# Altium PCB coaster.PcbDoc (part 1 of 2)
Units mm, origin at the board's own origin, x right, y up, seen from the top; angles counter-clockwise.
Board outline 33.53 x 29.59 mm, 2 copper layers (Top Layer, Bottom Layer); 49 components, 51 nets, 176 pads, 66 vias.
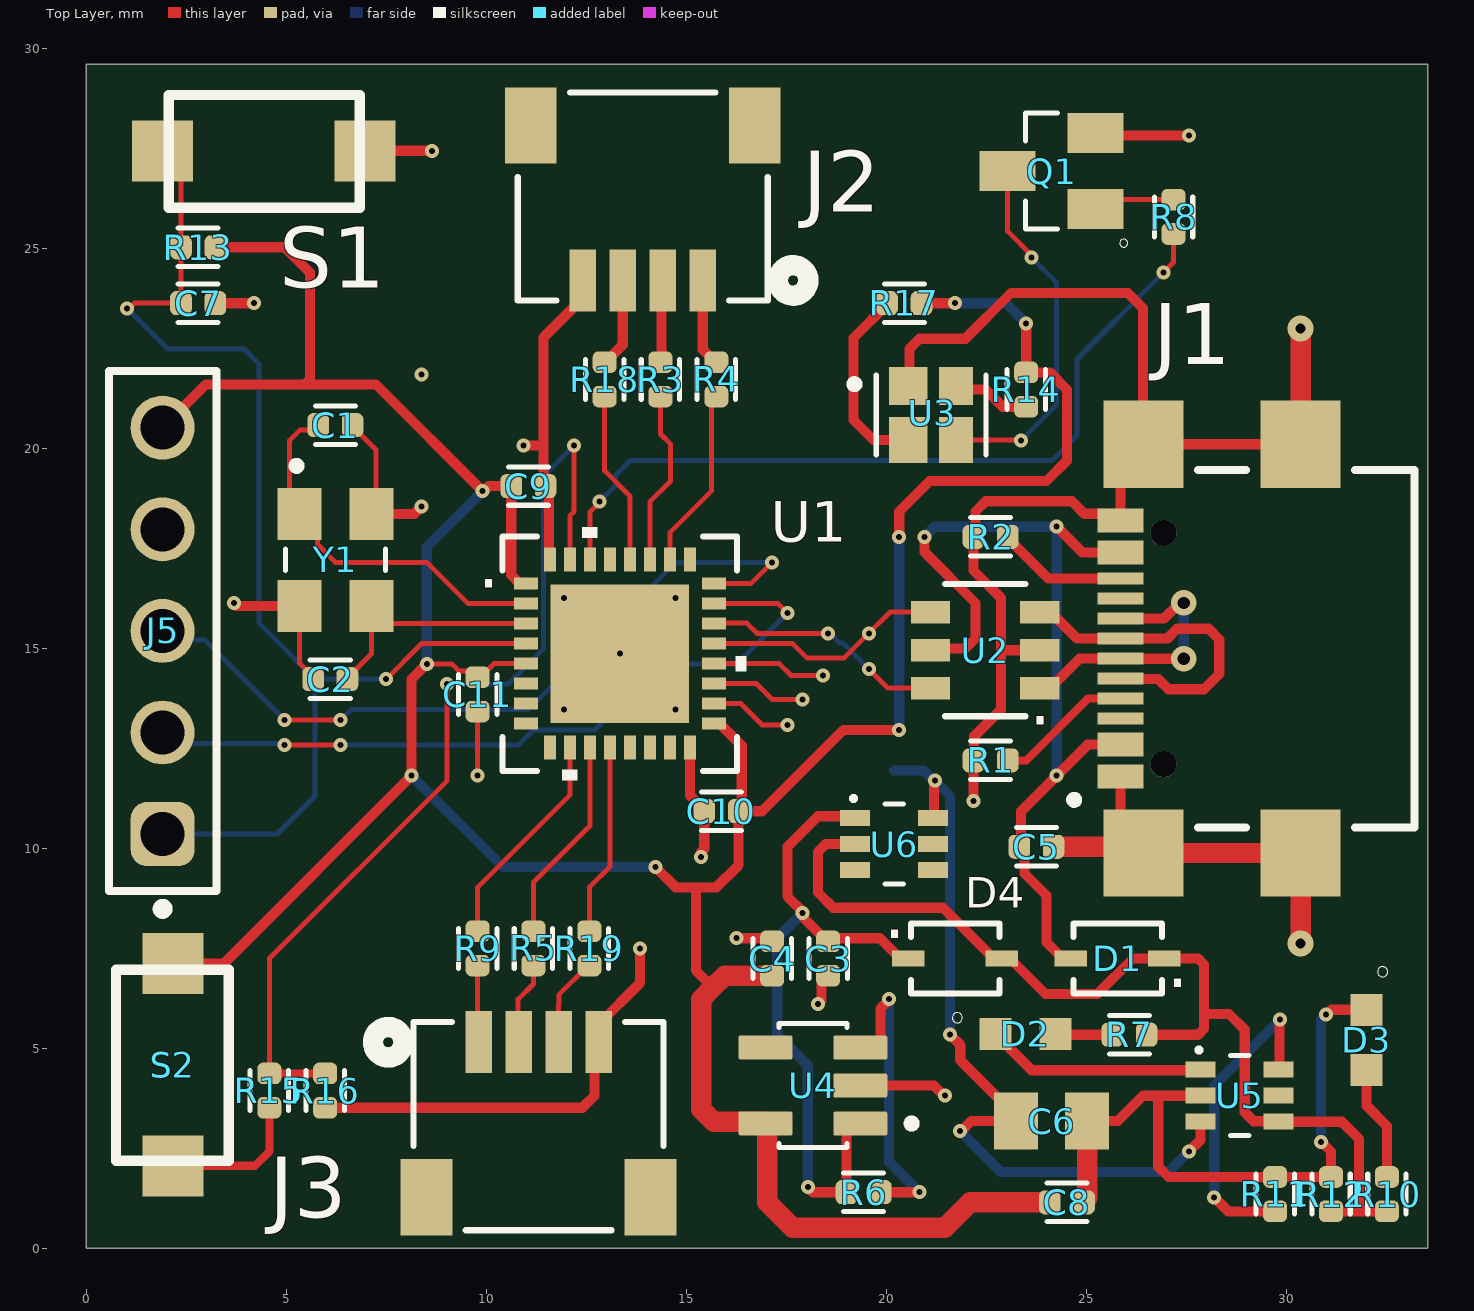
[diagram p0: Top Layer view]
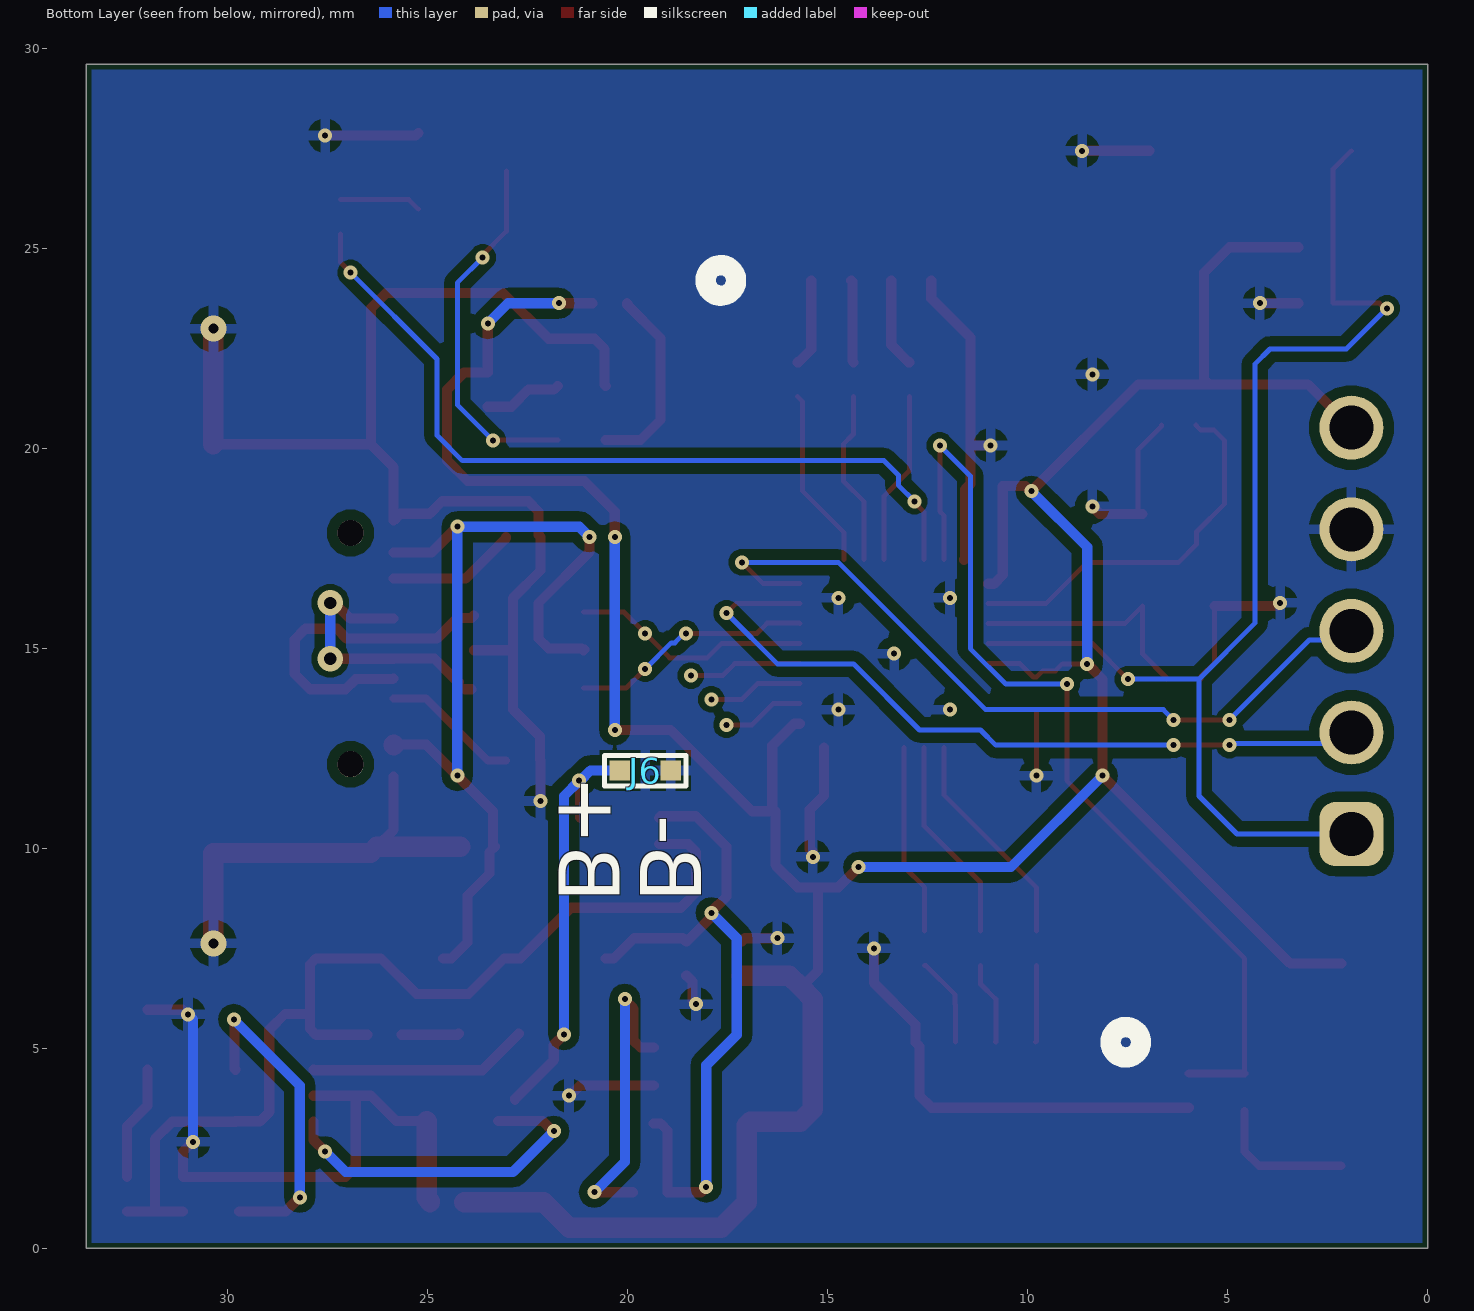
[diagram p1: Bottom Layer view, seen from below]
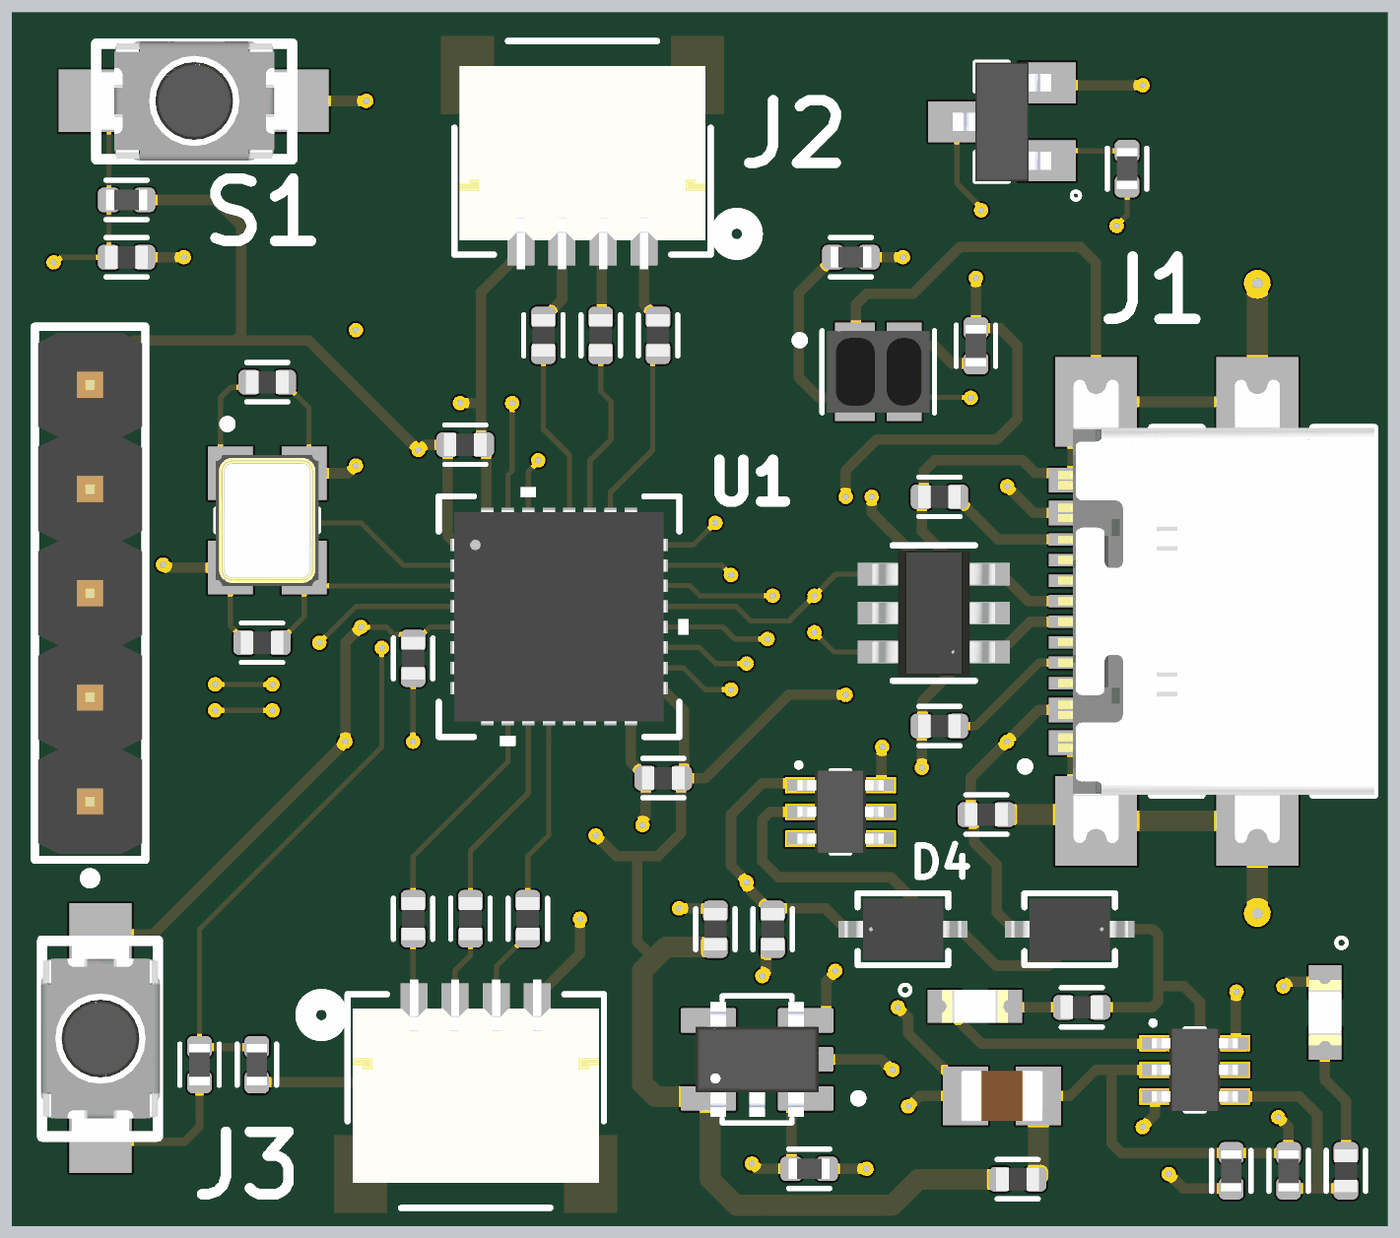
[diagram p2: 3D render of the assembled board from above, using the file's embedded part models]

## Layer stack, top to bottom
Top Solder: solder mask 0.0102, Solder Resist, Dk 3.5
Top Layer: signal copper 0.0356
Dielectric 1: dielectric 0.32, FR-4, Dk 4.8
Bottom Layer: signal copper 0.0356
Bottom Solder: solder mask 0.0102, Solder Resist, Dk 3.5

## Board outline
0,0 0,29.591 33.528,29.591 33.528,0

## Design rules (kind name [scope] priority, off if disabled: settings)
Clearance [All] p1: gap=0.254 ignorepadtopadclearanceinfootprint=TRUE except(0: Arc-Hole Track-Hole SMDPad-Hole THPad-Hole Via-Hole Fill-Hole Poly-Hole Region-Hole Text-Hole; 0.127: Arc-Arc Arc-Track Track-Track THPad-Via; 0.15: Via-Fill Via-Poly Via-Region; 0.152: Arc-SMDPad Track-SMDPad SMDPad-SMDPad; 0.203: Arc-Via Track-Via SMDPad-Via Via-Via)
PolygonConnect [All] p1: connectstyle=Relief reliefconductorwidth=0.254 reliefentries=4 polygonreliefangle="90 Angle" airgapwidth=0.254
RoomDefinition coaster [InComponentClass('coaster')] p1: confinementstyle=ConfineOut formatcopy=TRUE lockcomponents=FALSE outline 30.988,27.432 32.639,27.432 32.639,28.829 30.988,28.829
RoutingVias [All] p1: holewidth=0.15 width=0.35 viastyle="Through Hole" minholewidth=0.15 minwidth=0.35 maxholewidth=0.711 maxwidth=1.27
SolderMaskExpansion [All] p1: expansion=0.052 istentingtop=FALSE
Width [All] p1: maxlimit=0.508 minlimit=0.125 preferedwidth=0.254
30 further rules are at their usual default settings.

## Components (designator, comment, footprint, x,y, rotation, side; value= is the part's Value field where it differs from the comment)
C1 "C10" RC0402 6.223,20.574 r0 top
C2 "C10" RC0402 6.096,14.224 r180 top
C3 "CC0402KRX5R5BB105" RC0402 18.542,7.239 r270 top
C4 "CC0402KRX5R5BB105" RC0402 17.145,7.239 r90 top
C5 "104" CAPC1005X55N2 23.749,10.033 r0 top
C6 "CL21A106KOQNNNG" CAPC2012X140N 24.13,3.175 r180 top
C7 "104" CAPC1005X55N2 2.794,23.622 r0 top
C8 "104" CAPC1005X55N2 24.511,1.143 r0 top
C9 "104" CAPC1005X55N2 11.049,19.05 r0 top
C10 "104" CAPC1005X55N2 15.875,10.922 r180 top
C11 "104" CAPC1005X55N2 9.779,13.843 r90 top
D1 "SD103AWS-E3-08" CR_WS-E3-08_VIS-L 25.781,7.239 r180 top
D2 "LED" LEDM1608X80 23.47,5.357 r0 top
D3 "LED" LEDM1608X80 32.004,5.207 r270 top
D4 "SD103AWS-E3-08" CR_WS-E3-08_VIS-L 21.717,7.239 r0 top
J1 "USB-C" GCT_USB4110GFA 26.924,14.986 r90 top
J2 "SM04B-SRSS-TB" CONN_SM04B-SRSS-TB_JST 13.908,26.289 r0 top
J3 "SM04B-SRSS-TB" CONN_SM04B-SRSS-TB_JST 11.303,3.048 r180 top
J5 "61300511121" HEADER_M_5 1.905,15.43 r90 top
J6 "SMD_BATT_SOLDER" SMD_BATT_SOLDER 19.558,11.938 r90 bottom
Q1 "MMBT3904LT1G" SOT95P240X111-3N 24.131,26.924 r180 top
R1 "5K1" RC0402 22.606,12.192 r180 top
R2 "5K1" RC0402 22.606,17.78 r0 top
R3 "5K1" RC0402 14.351,21.717 r90 top
R4 "5K1" RC0402 15.748,21.717 r90 top
R5 "5K1" RC0402 11.176,7.493 r270 top
R6 "15K0402" RC0402X 19.431,1.397 r180 top
R7 "ERA-2AEB332X" RC0402 26.075,5.334 r180 top
R8 "15K0402" RC0402X 27.178,25.781 r270 top
R9 "5K1" RC0402 9.779,7.493 r270 top
R10 "ERA-2AEB332X" RC0402 32.512,1.348 r90 top
R11 "RC0402JR-0710KL" RC0402X 29.718,1.348 r90 top
R12 "RC0402JR-07100KL" RC0402X 31.115,1.348 r90 top
R13 "RC0402JR-0710KL" RC0402X 2.794,25.019 r0 top
R14 "CRGCQ1206F2K2" RC0402X 23.495,21.463 r90 top
R15 "RC0402JR-071KL" RC0402X 4.572,3.937 r90 top
R16 "RC0402JR-07100KL" RC0402X 5.969,3.937 r90 top
R17 "RC0402JR-0710KL" RC0402X 20.447,23.622 r180 top
R18 "5K1" RC0402 12.954,21.717 r90 top
R19 "5K1" RC0402 12.573,7.493 r270 top
S1 "SW_P" SW 4.445,27.432 r180 top
S2 "SW_P" SW 2.159,4.572 r90 top
U1 "STM32L432KBU6" UFQFPN-32 13.335,14.859 r0 top
U2 "USBLC6" SOT23-6L_STM 22.468,14.946 r180 top
U3 "VCNT2020" XDCR_VCNT2020 21.115,20.828 r0 top
U4 "AP2112K-3.3TRG1" SOT95P285X140-5N 18.161,4.064 r180 top
U5 "TP4057" SOP65P210X110-6N 28.829,3.81 r0 top
U6 "CJ3139KDW-G" SOP65P210X110-6N 20.193,10.098 r0 top
Y1 "ECS-80-12-33-JGN-TR" XTAL_ECS-240-8-33-AGN-TR 6.223,17.205 r270 top

## Footprints (in the part's own frame and the unit in brackets; to place one, negate y for a bottom-side part, rotate by r counter-clockwise, add the part's x,y. Pads: shape width x height; smd on the part's side, far side on the other; paste and mask are expansions set on the pad)
CAPC1005X55N2 [mm]
  rrect53% 0.54x0.6 smd: 1(-0.43,0) 2(0.43,0)
  silkscreen extent -0.5,-0.48 0.5,0.48, body extent -0.52,-0.28 0.52,0.28, height 0.56
CAPC2012X140N [mm]
  rect 1.1x1.43 smd: 1(-0.888,0) 2(0.888,0)
  body extent -1,-0.63 1,0.63, height 1.4
CONN_SM04B-SRSS-TB_JST [mil]
  rect 26x61 smd paste+0 mask+0: 1(59.06,-82.62) 2(19.68,-82.62) 3(-19.68,-82.62) 4(-59.06,-82.62)
  rect 51x75 smd paste-37.5 mask-37.5: 5(-110.24,69.94) 6(110.24,69.94)
  silkscreen extent -123,-102 163,102, body extent -118,-117 118,78, height 128
CR_WS-E3-08_VIS-L [mil]
  rect 32x16 smd paste+0 mask+0: 1(-46,0) 2(46,0)
  silkscreen extent -44,-35 44,35, body extent -56,-29 56,29, height 45
GCT_USB4110GFA [mm]
  rect 0.6x1.15 smd: A1/B12(-3.2,1.075) A4/B9(-2.4,1.075) B1/A12(3.2,1.075) B4/A9(2.4,1.075)
  rect 0.3x1.15 smd: A5(-1.25,1.075) A6(-0.25,1.075) A7(0.25,1.075) A8(1.25,1.075) B5(1.75,1.075) B6(0.75,1.075) B7(-0.75,1.075) B8(-1.75,1.075)
  rect 2.18x2 smd: S1(-5.11,0.5) S2(5.11,0.5) S3(-5.11,-3.43) S4(5.11,-3.43)
  round 0.65 hole 0.65 unplated: ""(-2.89,0) ""(2.89,0)
  silkscreen extent -4.47,-6.28 4.47,2.33, body extent -5.65,-6.28 5.65,1.42, height 3.26
HEADER_M_5 [mm] "Pin Header, pitch 2.54 mm, THT, Vertical, single row, 5p"
  rrect50% 1.6x1.6 hole 1.1: 1(-5.08,0)
  round 1.6 hole 1.1: 2(-2.54,0) 3(0,0) 4(2.54,0) 5(5.08,0)
  silkscreen extent -7.07,-1.35 6.5,1.35, body extent -6.35,-1.27 6.35,1.27, height 8.57
LEDM1608X80 [mm]
  rect 0.8x0.8 smd: A(0.75,0) C(-0.75,0)
  silkscreen extent -1.83,0.27 -1.57,0.53, body extent -0.8,-0.4 0.8,0.4, height 0.8
RC0402 [mm]
  rrect53% 0.54x0.6 smd: 1(-0.43,0) 2(0.43,0)
  silkscreen extent -0.5,-0.48 0.5,0.48, body extent -0.52,-0.28 0.52,0.28, height 0.56
RC0402X [mm]
  rrect53% 0.54x0.6 smd: 1(-0.43,0) 2(0.43,0)
  silkscreen extent -0.5,-0.48 0.5,0.48, body extent -0.5,-0.25 0.5,0.25, height 0.4
SMD_BATT_SOLDER [mil]
  rect 20x20 smd: 1(0,25) 2(0,-25)
  silkscreen extent -15,-40 15,40
SOP65P210X110-6N [mm]
  rect 0.75x0.4 smd paste-0.05 mask+0.05: 1(-0.975,0.65) 2(-0.975,0) 3(-0.975,-0.65) 4(0.975,-0.65) 5(0.975,0) 6(0.975,0.65)
  silkscreen extent -1.07,-1 0.23,1.19, body extent -1.05,-1 1.05,1, height 1.1
SOT23-6L_STM [mil]
  rect 38.5x22 smd paste+0 mask+0: 1(-53.75,37.4) 2(-53.75,0) 3(-53.75,-37.4) 4(53.75,-37.4) 5(53.75,0) 6(53.75,37.4)
  silkscreen extent -40,-65 40,65, body extent -59,-60 59,60, height 57
SOT95P240X111-3N [mm]
  rect 1.4x1 smd: 1(-1.1,0.95) 2(-1.1,-0.95) 3(1.1,0)
  silkscreen extent -1.9,-1.45 0.65,1.9, body extent -1.2,-1.45 1.2,1.45, height 1.11
SOT95P285X140-5N [mm]
  rrect15% 1.35x0.6 smd: 1(-1.185,0.95) 2(-1.185,0) 3(-1.185,-0.95) 4(1.185,-0.95) 5(1.185,0.95)
  silkscreen extent -2.57,-1.55 0.85,1.55, body extent -1.5,-1.4 1.5,1.4, height 1.4
SW [mil]
  rect 60x60 smd: 1(-99,0) 2(100,0)
  silkscreen extent -94,-55 94,56, body extent -94,-57 94,57, height 87
UFQFPN-32 [mm]
  rect 0.6x0.3 smd paste+0 mask+0: 1(-2.35,1.75) 2(-2.35,1.25) 3(-2.35,0.75) 4(-2.35,0.25) 5(-2.35,-0.25) 6(-2.35,-0.75) 7(-2.35,-1.25) 8(-2.35,-1.75) 17(2.35,-1.75) 18(2.35,-1.25) 19(2.35,-0.75) 20(2.35,-0.25) 21(2.35,0.25) 22(2.35,0.75) 23(2.35,1.25) 24(2.35,1.75)
  rect 0.3x0.6 smd paste+0 mask+0: 9(-1.75,-2.35) 10(-1.25,-2.35) 11(-0.75,-2.35) 12(-0.25,-2.35) 13(0.25,-2.35) 14(0.75,-2.35) 15(1.25,-2.35) 16(1.75,-2.35) 25(1.75,2.35) 26(1.25,2.35) 27(0.75,2.35) 28(0.25,2.35) 29(-0.25,2.35) 30(-0.75,2.35) 31(-1.25,2.35) 32(-1.75,2.35)
  rect 3.454x3.454 smd paste-1.727 mask+0: 33(0,0)
  silkscreen extent -2.93,-3.16 3.16,3.16, body extent -2.6,-2.6 2.6,2.6, height 1.4
XDCR_VCNT2020 [mm]
  rect 0.97x0.95 smd: 1(-0.57,0.725)
  rect 0.97x1.15 smd: 2(-0.57,-0.625)
  rect 0.85x0.95 smd: 3(0.63,0.725)
  rect 0.85x1.15 smd: 4(0.63,-0.625)
  silkscreen extent -2.01,-1 1.37,1, body extent -1.25,-1 1.25,1, height 0.8
XTAL_ECS-240-8-33-AGN-TR [mm]
  rect 1.3x1.1 smd: 1(-1.15,-0.9) 2(1.15,-0.9) 3(1.15,0.9) 4(-1.15,0.9)
  silkscreen extent -2.45,-1.25 0.27,1.25, body extent -1.6,-1.25 1.6,1.25, height 0.8

## Part data
C1 C2: "0402 10 pF 50 V ±5 % Tolerance NP0 SMT Multilayer Ceramic Capacitor", Capacitance=10pF, Case Code (Imperial)=0402, Case Code (Metric)=1005, Dielectric=C0G, Dielectric Material=4241ConductorMaterial, Insulation Resistance=100GR, Manufacturer=Yageo, Manufacturer Part Number=CC0402JRNPO9BN100, Max Operating Temperature=125°C, Min Operating Temperature=-55°C, Package Quantity=1, Supplier Part Number 1=311-1014-1-ND, Temperature Coefficient=30ppm/°C, Tolerance=5%, Voltage=50V, Case/Package=0402, Category="Ceramic Capacitors", ComponentLink1Description=https://datasheet.ciiva.com/11786/0900766b8079c870-11786158.pdf?src-supplier=Rs, ComponentLink1URL=https://datasheet.ciiva.com/11786/0900766b8079c870-11786158.pdf?src-supplier=Rs, ComponentLink2Description=https://datasheet.ciiva.com/143/mlccorderingcode-143992.pdf?src-supplier=Digikey, ComponentLink2URL=https://datasheet.ciiva.com/143/mlccorderingcode-143992.pdf?src-supplier=Digikey, ComponentLink3Description=https://datasheet.ciiva.com/143/mlccorderingcode-143993.pdf?src-supplier=Digikey, ComponentLink3URL=https://datasheet.ciiva.com/143/mlccorderingcode-143993.pdf?src-supplier=Digikey, ComponentLink4Description=https://datasheet.ciiva.com/143/mlccorderingcode-143994.pdf?src-supplier=Digikey, ComponentLink4URL=https://datasheet.ciiva.com/143/mlccorderingcode-143994.pdf?src-supplier=Digikey, ComponentLink5Description=https://datasheet.ciiva.com/8033/1443161-8033591.pdf?src-supplier=Element14, ComponentLink5URL=https://datasheet.ciiva.com/8033/1443161-8033591.pdf?src-supplier=Element14, ComponentLink6Description=https://datasheet.ciiva.com/8033/1443161-8033593.pdf?src-supplier=Element14, ComponentLink6URL=https://datasheet.ciiva.com/8033/1443161-8033593.pdf?src-supplier=Element14, ComponentLink7Description=https://datasheet.ciiva.com/8033/1443161-8033596.pdf?src-supplier=Element14, ComponentLink7URL=https://datasheet.ciiva.com/8033/1443161-8033596.pdf?src-supplier=Element14, ComponentLink8Description=https://datasheet.ciiva.com/28450/1443161-28450213.pdf?src-supplier=Element14, ComponentLink8URL=https://datasheet.ciiva.com/28450/1443161-28450213.pdf?src-supplier=Element14, ComponentLink9Description=https://datasheet.ciiva.com/5427/upy-gp-np0-16v-to-50v-8-5427741.pdf?src-supplier=Mouser, ComponentLink9URL=https://datasheet.ciiva.com/5427/upy-gp-np0-16v-to-50v-8-5427741.pdf?src-supplier=Mouser, Depth=0.5mm, Halogen Free=5694HalogenFree, Height=0.5mm, Lead Free="Lead Free", Length=1mm, Mount="Surface Mount", Number of Pins=2, Packaging="Tape and Reel", Pricing 1="1=0.1, 10=0.024, 100=0.0133, 1000=0.00812, 2500=0.00685, 5000=0.00609 (USD)", Radiation Hardening=No, Reach SVHC Compliant=No, RoHS=Yes, RoHS Compliant=Yes, Series=CC, Stock 1=1109319, Supplier 1=Digikey, Termination=SMD/SMT, Thickness=0.022inch, Voltage Rating=50V, Voltage Rating (AC)=50V, Voltage Rating (DC)=50V, Width=0.02inch
C3 C4: library part C105, "Multilayer Ceramic Capacitor, 1 uF, 100 V, ï¿½ 10%, X7R, 0402 [1005 Metric]", Capacitance=1uF, Case Code (Imperial)=0402, Case Code (Metric)=1005, Dielectric=X5R, Dielectric Material=Ceramic, Manufacturer=Yageo, Max Operating Temperature=85°C, Min Operating Temperature=-55°C, Supplier Part Number 1=311-1438-1-ND, Temperature Coefficient=30ppm/°C, Tolerance=10%, Voltage Rating=6.3V, Case/Package=0402, Category="Ceramic Capacitors", ComponentLink1Description=https://datasheet.ciiva.com/5789/70765-5789520.pdf?src-supplier=Farnell, ComponentLink1URL=https://datasheet.ciiva.com/5789/70765-5789520.pdf?src-supplier=Farnell, ComponentLink2Description=https://datasheet.ciiva.com/176/mlccorderingcode-176609.pdf?src-supplier=Digikey, ComponentLink2URL=https://datasheet.ciiva.com/176/mlccorderingcode-176609.pdf?src-supplier=Digikey, ComponentLink3Description=https://datasheet.ciiva.com/176/mlccorderingcode-176610.pdf?src-supplier=Digikey, ComponentLink3URL=https://datasheet.ciiva.com/176/mlccorderingcode-176610.pdf?src-supplier=Digikey, ComponentLink4Description=https://datasheet.ciiva.com/176/mlccorderingcode-176611.pdf?src-supplier=Digikey, ComponentLink4URL=https://datasheet.ciiva.com/176/mlccorderingcode-176611.pdf?src-supplier=Digikey, ComponentLink5Description=https://datasheet.ciiva.com/11464/upy-gphc-x5r-4v-to-50v-12-11464863.pdf?src-supplier=Avnet, ComponentLink5URL=https://datasheet.ciiva.com/11464/upy-gphc-x5r-4v-to-50v-12-11464863.pdf?src-supplier=Avnet, ComponentLink6Description=https://datasheet.ciiva.com/8033/1525783-8033643.pdf?src-supplier=Element14, ComponentLink6URL=https://datasheet.ciiva.com/8033/1525783-8033643.pdf?src-supplier=Element14, ComponentLink7Description=https://datasheet.ciiva.com/8033/1525783-8033644.pdf?src-supplier=Element14, ComponentLink7URL=https://datasheet.ciiva.com/8033/1525783-8033644.pdf?src-supplier=Element14, ComponentLink8Description=https://datasheet.ciiva.com/8033/70765-8033646.pdf?src-supplier=Element14, ComponentLink8URL=https://datasheet.ciiva.com/8033/70765-8033646.pdf?src-supplier=Element14, ComponentLink9Description=https://datasheet.ciiva.com/28450/1359354-28450285.pdf?src-supplier=Element14, ComponentLink9URL=https://datasheet.ciiva.com/28450/1359354-28450285.pdf?src-supplier=Element14, Depth=0.5mm, Halogen Free=5694HalogenFree, Height=0.5mm, Lead Free="Lead Free", Length=1mm, Manufacturer Part Number=CC0402KRX5R5BB105, Material=Ceramic, Mount="Surface Mount", Number of Pins=2, Packaging="Tape and Reel", Pricing 1="1=0.1, 10=0.054, 100=0.0318, 1000=0.02066, 2500=0.01646, 5000=0.01625 (USD)", Radiation Hardening=No, Reach SVHC Compliant=No, RoHS=Yes, RoHS Compliant=Yes, Series=CC, Stock 1=21136934, Supplier 1=Digikey, Termination=SMD/SMT, Voltage Rating (AC)=6.3V, Voltage Rating (DC)=6.3V, Width=0.5mm
C5 C7 C8 C9 C10 C11: library part CC0402KRX7R7BB104, "Multilayer Ceramic Capacitor, 0.1 uF, 16 V, ï¿½ 10%, X7R, 0402 [1005 Metric]", Capacitance=100nF, Case Code (Imperial)=0402, Case Code (Metric)=1005, Dielectric=X7R, LCSC=C60474, Manufacturer=Yageo, Max Operating Temperature=125°C, Min Operating Temperature=-55°C, Package Quantity=1, Supplier Part Number 1=311-1338-1-ND, Temperature Coefficient=30ppm/°C, Tolerance=10%, Voltage=16V, Case/Package=0402, Category="Ceramic Capacitors", ComponentLink1Description=https://datasheet.ciiva.com/11788/0900766b80ce67ed-11788364.pdf?src-supplier=Rs, ComponentLink1URL=https://datasheet.ciiva.com/11788/0900766b80ce67ed-11788364.pdf?src-supplier=Rs, ComponentLink2Description=https://datasheet.ciiva.com/7978/1489800-7978111.pdf?src-supplier=Element14, ComponentLink2URL=https://datasheet.ciiva.com/7978/1489800-7978111.pdf?src-supplier=Element14, ComponentLink3Description=https://datasheet.ciiva.com/161/mlccorderingcode-161545.pdf?src-supplier=Digikey, ComponentLink3URL=https://datasheet.ciiva.com/161/mlccorderingcode-161545.pdf?src-supplier=Digikey, ComponentLink4Description=https://datasheet.ciiva.com/161/mlccorderingcode-161544.pdf?src-supplier=Digikey, ComponentLink4URL=https://datasheet.ciiva.com/161/mlccorderingcode-161544.pdf?src-supplier=Digikey, ComponentLink5Description=https://datasheet.ciiva.com/161/mlccorderingcode-161546.pdf?src-supplier=Digikey, ComponentLink5URL=https://datasheet.ciiva.com/161/mlccorderingcode-161546.pdf?src-supplier=Digikey, ComponentLink6Description=https://datasheet.ciiva.com/8033/1734573-8033661.pdf?src-supplier=Element14, ComponentLink6URL=https://datasheet.ciiva.com/8033/1734573-8033661.pdf?src-supplier=Element14, ComponentLink7Description=https://datasheet.ciiva.com/11587/upy-gphc-x7r-6-3v-to-50v-8-11587305.pdf?src-supplier=Avnet, ComponentLink7URL=https://datasheet.ciiva.com/11587/upy-gphc-x7r-6-3v-to-50v-8-11587305.pdf?src-supplier=Avnet, Depth=0.5mm, Halogen Free=5694HalogenFree, Height=0.5mm, Lead Free=5697LeadFree, Length=1mm, Manufacturer Part Number=CC0402KRX7R7BB104, Material=4241ConductorMaterial, Mount="Surface Mount", Number of Pins=2, Packaging="Tape and Reel", Pricing 1="1=0.1, 10=0.024, 50=0.0164, 100=0.0139, 500=0.0098, 1000=0.00852, 2500=0.00718, 5000=0.00636 (USD)", Radiation Hardening=No, Reach SVHC Compliant=No, RoHS=Yes, RoHS Compliant=Yes, Series=CC, Stock 1=15609894, Supplier 1=Digikey, Termination=SMD/SMT, Thickness=0.022inch, Voltage Rating=16V, Voltage Rating (AC)=16V, Voltage Rating (DC)=16V, Width=0.02inch
C6: library part 10uF16v0805, "10 ÂµF Â±10% 16V Ceramic Capacitor X5R 0805 (2012 Metric)", Package="2012-2 SAMSUNG", Check_prices=https://www.snapeda.com/parts/CL21A106KOQNNNG/Samsung/view-part/?ref=eda, MF="Samsung Electro-Mechanics", MP=CL21A106KOQNNNG, SnapEDA_Link=https://www.snapeda.com/parts/CL21A106KOQNNNG/Samsung/view-part/?ref=snap
D1 D4: "SCHOTTKY DIODE SOD323", Manufacturer_Name=Vishay, Copyright="Copyright (C) 2025 Ultra Librarian. All rights reserved.", Datasheet=https://www.vishay.com/doc?85682, Manufacturer_Part_Number=SD103AWS-E3-08
D2 D3: library part LTST-C190KFKT, "Single Color LED, Ultra Bright Orange, Water Clear, 1.1mm", Case Code (Imperial)=0603, Case Code (Metric)=1608, Color=Orange, Forward Current=30mA, Forward Voltage=2V, Lens Color=Colorless, Manufacturer="Vishay Lite-On", Max Operating Temperature=85°C, Min Operating Temperature=-55°C, Package Quantity=3000, Power Dissipation=75mW, Resistance=47kR, Reverse Voltage=5V, Supplier Part Number 1=160-1434-1-ND, Test Current=20mA, Tolerance=1%, Voltage Rating=50V, Case/Package=0603, Category=LEDs, ComponentLink1Description=https://datasheet.ciiva.com/11774/0900766b80dc02a7-11774744.pdf?src-supplier=Rs, ComponentLink1URL=https://datasheet.ciiva.com/11774/0900766b80dc02a7-11774744.pdf?src-supplier=Rs, ComponentLink2Description=https://datasheet.ciiva.com/15201/getdatasheetpartid-309341-15201388.pdf?src-supplier=Verical, ComponentLink2URL=https://datasheet.ciiva.com/15201/getdatasheetpartid-309341-15201388.pdf?src-supplier=Verical, ComponentLink3Description=https://datasheet.ciiva.com/16396/lite-on20ltst-c190kfkt-16396246.pdf?src-supplier=Future+Electronics, ComponentLink3URL=https://datasheet.ciiva.com/16396/lite-on20ltst-c190kfkt-16396246.pdf?src-supplier=Future+Electronics, ComponentLink4Description=https://datasheet.ciiva.com/12400/100-ltst-c190kfkt-53640-12400769.pdf?src-supplier=Mouser, ComponentLink4URL=https://datasheet.ciiva.com/12400/100-ltst-c190kfkt-53640-12400769.pdf?src-supplier=Mouser, ComponentLink5Description=https://datasheet.ciiva.com/2109/s-110-ltst-c190kfkt-2109976.pdf?src-supplier=Digikey, ComponentLink5URL=https://datasheet.ciiva.com/2109/s-110-ltst-c190kfkt-2109976.pdf?src-supplier=Digikey, ComponentLink6Description=https://datasheet.ciiva.com/2109/s-110-ltst-c190kfkt-2109977.pdf?src-supplier=Digikey, ComponentLink6URL=https://datasheet.ciiva.com/2109/s-110-ltst-c190kfkt-2109977.pdf?src-supplier=Digikey, ComponentLink7Description=https://datasheet.ciiva.com/2109/s-110-ltst-c190kfkt-2109978.pdf?src-supplier=Digikey, ComponentLink7URL=https://datasheet.ciiva.com/2109/s-110-ltst-c190kfkt-2109978.pdf?src-supplier=Digikey, Depth=1.6mm, Dominant Wavelength=605nm, Height=0.9mm, Illumination Color=Orange, Lead Free="Lead Free", Length=3.2mm, Lens Size=0.8mm, Lens Style=Flat,Diffused,Colorless,Rectangular,Clear, Lens Transparency=Clear, Luminous Intensity=90mcd, Manufacturer Part Number=LTST-C190KFKT, Mount="Surface Mount", Number of Elements=1, Number of LEDs=1, Number of Pins=2, Packaging="Tape and Reel", Power Rating=75mW, Pricing 1="1=0.13, 10=0.089, 100=0.0613, 500=0.0484, 1000=0.0441, 2000=0.04042 (USD)", Radiation Hardening=No, Reach SVHC Compliant=4186SVHC, RoHS=Yes, RoHS Compliant=Yes, Series=-, Stock 1=96032, Supplier 1=Digikey, Viewing Angle=130°, Voltage Rating (DC)=50V, Wavelength=605nm, Width=0.8mm
J1: library part USB4110-GF-A, "C42400246", Manufacturer=HOAUC, Supplier Part Number 1=2073-USB4110-GF-A-1-ND, Voltage Rating=20V, Category="USB Connectors", ComponentLink1Description=https://gct.co/files/drawings/usb4110.pdf?src-supplier=Digikey, ComponentLink1URL=https://gct.co/files/drawings/usb4110.pdf?src-supplier=Digikey, Contact Material=153,157ConductorMaterial, Height=3.46mm, Manufacturer Part Number=C42400246, Number of Contacts=16NUMBER, Number of Pins=16NUMBER, Orientation=5496OrientationType, Pricing 1="1=1.64, 10=1.244, 25=1.1176, 50=1.032, 100=0.9547, 250=0.86368, 500=0.80254 (USD)", RoHS=No, Stock 1=30215, Supplier 1=Digikey, USB Standard=6108USBStandard
J2 J3: "No Description Available", Manufacturer_Name=JST, Copyright="Copyright (C) 2025 Ultra Librarian. All rights reserved.", Manufacturer_Part_Number=SM04B-SRSS-TB, RefDes=RefDes, Type=Type
J5: library part HEADER_M_5, "THT Vertical Pin Header WR-PHD, Pitch 2.54 mm, Single Row, 5 pins", Color=Black, Contact Resistance=20mR, Current Rating=3A, Manufacturer="Wurth Electronics", Max Operating Temperature=105°C, Min Operating Temperature=-40°C, Operating Supply Voltage=250V, Supplier Part Number 1=732-5318-ND, Category="Headers and Wire Housings", ComponentLink1Description=https://katalog.we-online.de/em/datasheet/6130xx11121.pdf?src-supplier=Digikey, ComponentLink1URL=https://katalog.we-online.de/em/datasheet/6130xx11121.pdf?src-supplier=Digikey, ComponentLink2Description=http://www.farnell.com/cad/1737268.pdf?src-supplier=Element14, ComponentLink2URL=http://www.farnell.com/cad/1737268.pdf?src-supplier=Element14, ComponentLink3Description=https://datasheet.octopart.com/61300511121-W%C3%BCrth-Elektronik-datasheet-21154836.pdf?src-supplier=Element14, ComponentLink3URL=https://datasheet.octopart.com/61300511121-W%C3%BCrth-Elektronik-datasheet-21154836.pdf?src-supplier=Element14, Contact Material=Copper, Contact Mating Length=0.236inch, Contact Plating=Gold, Contact Type="Male Pin", Gender=Male, Height=8.89mm, Lead Free="Lead Free", Manufacturer Part Number=61300511121, Mount="Through Hole", Number of Contacts=5, Number of Positions=5, Number of Rows=1, Orientation=Vertical, Packaging=Bulk, Pitch=0.1inch, Pricing 1="1=0.24, 10=0.2, 25=0.1664, 50=0.1396, 100=0.1269, 1000=0.11625 (USD)", Reach SVHC Compliant=Unknown, RoHS=Yes, RoHS Compliant=Yes, Series=WR-PHD, Stock 1=61079, Supplier 1=Digikey, Termination=Solder, Voltage Rating=250V
Q1: "Transistor, Bipolar,Si,NPN,General Purpose,VCEO 40VDC,IC 200mA,PD 225mW,SOT-23", Package="SOT-23-3 ON Semiconductor", Check_prices=https://www.snapeda.com/parts/MMBT3904LT1G/Onsemi/view-part/?ref=eda, MF="ON Semiconductor", MP=MMBT3904LT1G, SnapEDA_Link=https://www.snapeda.com/parts/MMBT3904LT1G/Onsemi/view-part/?ref=snap
R1 R2 R3 R4 R5 R9 R18 R19: library part RC0402FR-075K1L, "SMD Chip Resistor, 5.1 kOhm, ï¿½ 1%, 62.5 mW, 0402 [1005 Metric], Thick Film, General Purpose", Case Code (Imperial)=0402, Case Code (Metric)=1005, LCSC=C105872, Manufacturer=Yageo, Max Operating Temperature=155°C, Max Power Dissipation=63mW, Min Operating Temperature=-55°C, Package Quantity=1, Resistance=5.1kR, Resistance Tolerance=1%, Resistor Type="Thick Film", Supplier Part Number 1=311-5.10KLRCT-ND, Temperature Coefficient=100ppm/°C, Voltage Rating=50V, Case/Package=0402, Category="Chip SMD Resistors", Construction=Rectangular, Depth=0.5mm, Features="Moisture Resistant", Height=0.016inch, Lead Free=5697LeadFree, Length=1mm, Manufacturer Part Number=RC0402FR-075K1L, Military Standard=Not, Number of Terminations=2, Packaging="Tape and Reel", Power Rating=63mW, Pricing 1="1=0.1, 10=0.009, 50=0.0072, 100=0.0041, 500=0.00306 (USD)", Reach SVHC Compliant=Unknown, RoHS=Yes, RoHS Compliant=Yes, Series=RC, Stock 1=868211, Supplier 1=Digikey, Technology="THICK FILM", Termination=SMD/SMT, Tolerance=1%, Voltage Rating (DC)=50V, Width=0.02inch, Working Voltage=50V
R6 R8: "Res Thin Film 0402 15K Ohm 0.1% 0.063W(1/16W) ±25ppm/C Pad SMD T/R", Case Code (Imperial)=0402, Case Code (Metric)=1005, Manufacturer=Yageo, Manufacturer Part Number=RT0402BRD0715KL, Max Operating Temperature=155°C, Max Power Dissipation=63mW, Min Operating Temperature=-55°C, Package Quantity=10000, Power Rating=62.5mW, Resistance=15kR, Supplier Part Number 1=YAG2302CT-ND, Temperature Coefficient=25ppm/°C, Tolerance=0.1%, Voltage Rating=50V, Case/Package=0402, Category="Chip SMD Resistors", ComponentLink1Description=https://datasheet.ciiva.com/2582/pyu-rt-1-to-0-05-rohs-l-5-2582151.pdf?src-supplier=Digikey, ComponentLink1URL=https://datasheet.ciiva.com/2582/pyu-rt-1-to-0-05-rohs-l-5-2582151.pdf?src-supplier=Digikey, ComponentLink2Description=https://datasheet.ciiva.com/12723/pyu-rt-1-to-0-05-rohs-l-4-12723782.pdf?src-supplier=Mouser, ComponentLink2URL=https://datasheet.ciiva.com/12723/pyu-rt-1-to-0-05-rohs-l-4-12723782.pdf?src-supplier=Mouser, Features="Moisture Resistant", Height=0.014inch, Lead Free="Lead Free", Length=0.039inch, Number of Terminations=2, Packaging="Tape and Reel", Pricing 1="1=0.17, 10=0.116, 50=0.1, 100=0.0877, 500=0.06834, 1000=0.06018, 5000=0.04488 (USD)", RoHS=Yes, RoHS Compliant=Yes, Series=RT, Size Code=0402, Stock 1=36293, Supplier 1=Digikey, Termination=SMD/SMT, Voltage Rating (DC)=50V, Width=0.02inch
R7 R10: library part 3.3K402, "Res Thin Film 0402 3.3K Ohm 0.1% 0.063W ±25ppm/°C Molded SMD Punched Carrier T/R", Case Code (Imperial)=0402, Case Code (Metric)=1005, Manufacturer=Panasonic, Max Operating Temperature=155°C, Max Power Dissipation=63mW, Min Operating Temperature=-55°C, Package Quantity=1, Resistance=3.3kR, Resistance Tolerance=0.1%, Resistor Type="Thin Film,Metal Film", Supplier Part Number 1=P3.3KDCCT-ND, Temperature Coefficient=25ppm/°C, Voltage Rating=25V, Case/Package=0402, Category="Chip SMD Resistors", ComponentLink1Description=https://datasheet.ciiva.com/30239/54aoa0000ce26-30239514.pdf?src-supplier=Onlinecomponents.com, ComponentLink1URL=https://datasheet.ciiva.com/30239/54aoa0000ce26-30239514.pdf?src-supplier=Onlinecomponents.com, ComponentLink2Description=https://datasheet.ciiva.com/16395/aoa0000ce26-16395246.pdf?src-supplier=Future+Electronics, ComponentLink2URL=https://datasheet.ciiva.com/16395/aoa0000ce26-16395246.pdf?src-supplier=Future+Electronics, Contact Plating=Tin, Depth=0.5mm, Height=0.35mm, Lead Free="Lead Free", Length=1mm, Manufacturer Part Number=ERA-2AEB332X, Mount="Surface Mount", Number of Pins=2, Number of Terminations=2, Packaging="Tape and Reel", Power Rating=63mW, Pricing 1="1=0.1, 10=0.082, 50=0.0716, 100=0.0677, 500=0.05944, 1000=0.05637, 5000=0.05076 (USD)", Radiation Hardening=No, Reach SVHC Compliant=No, RoHS=Yes, RoHS Compliant=Yes, Series=ERA, Size Code=0402, Stock 1=52848, Supplier 1=Digikey, Technology="METAL FILM", Termination=SMD/SMT, Tolerance=0.1%, Voltage Rating (DC)=25V, Weight=2.8E-05oz, Width=0.5mm
R11 R13 R17: library part 10K0402, "SMD Chip Resistor, 10 Kohm, ½ 5%, 62.5 Mw, 0402 [1005 Metric], Thick Film, General Purpose", Case Code (Imperial)=0402, Case Code (Metric)=1005, Manufacturer=Yageo, Max Operating Temperature=155°C, Max Power Dissipation=63mW, Min Operating Temperature=-55°C, Package Quantity=1, Power Rating=62.5mW, Resistance=10kR, Resistance Tolerance=5%, Resistor Type="Thick Film", Supplier Part Number 1=311-10KJRCT-ND, Temperature Coefficient=100ppm/°C, Voltage Rating=50V, Case/Package=0402, Category="Chip SMD Resistors", ComponentLink1Description=https://datasheet.ciiva.com/2452/pyu-r-int-thick-7-2452626.pdf?src-supplier=Digikey, ComponentLink1URL=https://datasheet.ciiva.com/2452/pyu-r-int-thick-7-2452626.pdf?src-supplier=Digikey, ComponentLink2Description=https://datasheet.ciiva.com/2452/pyu-r-int-thick-7-2452627.pdf?src-supplier=Digikey, ComponentLink2URL=https://datasheet.ciiva.com/2452/pyu-r-int-thick-7-2452627.pdf?src-supplier=Digikey, ComponentLink3Description=https://datasheet.ciiva.com/2452/pyu-r-int-thick-7-2452628.pdf?src-supplier=Digikey, ComponentLink3URL=https://datasheet.ciiva.com/2452/pyu-r-int-thick-7-2452628.pdf?src-supplier=Digikey, ComponentLink4Description=https://datasheet.ciiva.com/7850/1018594-7850136.pdf?src-supplier=Element14, ComponentLink4URL=https://datasheet.ciiva.com/7850/1018594-7850136.pdf?src-supplier=Element14, ComponentLink5Description=https://datasheet.ciiva.com/7850/1018594-7850137.pdf?src-supplier=Element14, ComponentLink5URL=https://datasheet.ciiva.com/7850/1018594-7850137.pdf?src-supplier=Element14, ComponentLink6Description=https://datasheet.ciiva.com/12669/pyu-rc0402-51-rohs-l-6-r-12669687.pdf?src-supplier=Mouser, ComponentLink6URL=https://datasheet.ciiva.com/12669/pyu-rc0402-51-rohs-l-6-r-12669687.pdf?src-supplier=Mouser, Construction=Rectangular, Depth=0.5mm, Features="Moisture Resistant", Height=0.016inch, Lead Free="Lead Free", Length=0.039inch, Manufacturer Part Number=RC0402JR-0710KL, Military Standard=Not, Number of Terminations=2, Packaging="Tape and Reel", Pricing 1="1=0.1, 10=0.007, 50=0.0066, 100=0.0061, 500=0.0051, 1000=0.00408, 5000=0.00306 (USD)", Reach SVHC Compliant=Unknown, RoHS=Yes, RoHS Compliant=Yes, Series=RC, Size Code=0402, Stock 1=12014577, Supplier 1=Digikey, Termination=SMD/SMT, Tolerance=5%, Voltage Rating (AC)=50V, Width=0.02inch
R12 R16: library part 100K0402, "SMD Chip Resistor, 100 Kohm, ½ 5%, 62.5 Mw, 0402 [1005 Metric], Thick Film, General Purpose", Case Code (Imperial)=0402, Case Code (Metric)=1005, Manufacturer=Yageo, Max Operating Temperature=155°C, Max Power Dissipation=63mW, Min Operating Temperature=-55°C, Power Rating=62.5mW, Resistance=100kR, Resistance Tolerance=5%, Resistor Type="Thick Film", Supplier Part Number 1=311-100KJRCT-ND, Temperature Coefficient=100ppm/°C, Voltage Rating=50V, Case/Package=0402, Category="Chip SMD Resistors", ComponentLink1Description=https://datasheet.ciiva.com/2491/pyu-r-int-thick-7-2491208.pdf?src-supplier=Digikey, ComponentLink1URL=https://datasheet.ciiva.com/2491/pyu-r-int-thick-7-2491208.pdf?src-supplier=Digikey, ComponentLink2Description=https://datasheet.ciiva.com/2491/pyu-r-int-thick-7-2491209.pdf?src-supplier=Digikey, ComponentLink2URL=https://datasheet.ciiva.com/2491/pyu-r-int-thick-7-2491209.pdf?src-supplier=Digikey, ComponentLink3Description=https://datasheet.ciiva.com/2491/pyu-r-int-thick-7-2491207.pdf?src-supplier=Digikey, ComponentLink3URL=https://datasheet.ciiva.com/2491/pyu-r-int-thick-7-2491207.pdf?src-supplier=Digikey, ComponentLink4Description=https://datasheet.ciiva.com/17052/pyu-rc0402-51-rohs-l-6-r-17052137.pdf?src-supplier=Future+Electronics, ComponentLink4URL=https://datasheet.ciiva.com/17052/pyu-rc0402-51-rohs-l-6-r-17052137.pdf?src-supplier=Future+Electronics, ComponentLink5Description=https://datasheet.ciiva.com/46394/1018594-46394941.pdf?src-supplier=Element14, ComponentLink5URL=https://datasheet.ciiva.com/46394/1018594-46394941.pdf?src-supplier=Element14, ComponentLink6Description=https://datasheet.ciiva.com/7850/1018594-7850133.pdf?src-supplier=Element14, ComponentLink6URL=https://datasheet.ciiva.com/7850/1018594-7850133.pdf?src-supplier=Element14, ComponentLink7Description=https://datasheet.ciiva.com/12668/pyu-rc0402-51-rohs-l-6-r-12668218.pdf?src-supplier=Mouser, ComponentLink7URL=https://datasheet.ciiva.com/12668/pyu-rc0402-51-rohs-l-6-r-12668218.pdf?src-supplier=Mouser, Construction=Rectangular, Depth=0.5mm, Features="Moisture Resistant", Lead Free="Lead Free", Length=1mm, Manufacturer Part Number=RC0402JR-07100KL, Military Standard=Not, Number of Terminations=2, Packaging="Tape and Reel", Pricing 1="1=0.1, 10=0.006, 50=0.0056, 100=0.0051, 500=0.00306, 1000=0.00284 (USD)", Reach SVHC Compliant=Unknown, RoHS=Yes, RoHS Compliant=Yes, Series=RC, Size Code=0402, Stock 1=5152961, Supplier 1=Digikey, Termination=SMD/SMT, Tolerance=5%, Voltage Rating (AC)=50V
R14: library part R1206F2K2, "SMD Chip Resistor, 2.2 kOhm, ± 1%, 250 mW, 1206 [3216 Metric], Thick Film, General Purpose", Case/Package=1206, Manufacturer="TE Connectivity", Max Operating Temperature=155°C, Min Operating Temperature=-55°C, Operating Supply Voltage=200V, Power Rating=250mW, Resistance=2.2kR, Supplier Part Number 1=A129814CT-ND, Temperature Coefficient=100ppm/°C, Category="Chip SMD Resistors", ComponentLink1Description=https://www.te.com/commerce/DocumentDelivery/DDEController?Action=srchrtrv&DocNm=1773204-3&DocType=DS&DocLang=English&src-supplier=Digikey, ComponentLink1URL=https://www.te.com/commerce/DocumentDelivery/DDEController?Action=srchrtrv&DocNm=1773204-3&DocType=DS&DocLang=English&src-supplier=Digikey, ComponentLink2Description=https://www.te.com/commerce/DocumentDelivery/DDEController?Action=srchrtrv&amp;DocNm=1773204-3&amp;DocType=DS&amp;DocLang=English&src-supplier=Digikey, ComponentLink2URL=https://www.te.com/commerce/DocumentDelivery/DDEController?Action=srchrtrv&amp;DocNm=1773204-3&amp;DocType=DS&amp;DocLang=English&src-supplier=Digikey, ComponentLink3Description=https://datasheet.octopart.com/CRGCQ1206F2K2-TE-Connectivity-datasheet-114679081.pdf?src-supplier=Master+Electronics, ComponentLink3URL=https://datasheet.octopart.com/CRGCQ1206F2K2-TE-Connectivity-datasheet-114679081.pdf?src-supplier=Master+Electronics, Height=650um, Manufacturer Part Number=CRGCQ1206F2K2, Packaging="Cut Tape", Pricing 1="1=0.1, 10=0.046, 100=0.0242, 1000=0.01451, 2500=0.01234 (USD)", RoHS=Yes, RoHS Compliant=Yes, Stock 1=205224, Supplier 1=Digikey, Voltage Rating=200V, Voltage Rating (DC)=200V
R15: library part 1K0402, "SMD Chip Resistor, 1 Kohm, ½ 5%, 63 Mw, 0402 [1005 Metric], Thick Film, General Purpose", Case Code (Imperial)=0402, Case Code (Metric)=1005, Manufacturer=Yageo, Max Operating Temperature=155°C, Max Power Dissipation=63mW, Min Operating Temperature=-55°C, Package Quantity=1, Power Rating=62.5mW, Resistance=1kR, Resistance Tolerance=5%, Resistor Type="Thick Film", Supplier Part Number 1=311-1.0KJRCT-ND, Temperature Coefficient=100ppm/°C, Voltage Rating=50V, Case/Package=0402, Category="Chip SMD Resistors", ComponentLink1Description=https://datasheet.ciiva.com/2452/pyu-r-int-thick-7-2452755.pdf?src-supplier=Digikey, ComponentLink1URL=https://datasheet.ciiva.com/2452/pyu-r-int-thick-7-2452755.pdf?src-supplier=Digikey, ComponentLink2Description=https://datasheet.ciiva.com/2452/pyu-r-int-thick-7-2452756.pdf?src-supplier=Digikey, ComponentLink2URL=https://datasheet.ciiva.com/2452/pyu-r-int-thick-7-2452756.pdf?src-supplier=Digikey, ComponentLink3Description=https://datasheet.ciiva.com/2452/pyu-r-int-thick-7-2452757.pdf?src-supplier=Digikey, ComponentLink3URL=https://datasheet.ciiva.com/2452/pyu-r-int-thick-7-2452757.pdf?src-supplier=Digikey, Features="Moisture Resistant", Height=0.016inch, Lead Free="Lead Free", Length=0.039inch, Manufacturer Part Number=RC0402JR-071KL, Number of Terminations=2, Packaging="Cut Tape", Pricing 1="1=0.1, 10=0.007, 50=0.0056, 100=0.0041, 500=0.00356, 1000=0.00306, 5000=0.00284 (USD)", Reach SVHC Compliant=No, RoHS=Yes, RoHS Compliant=Yes, Series=RC, Size Code=0402, Stock 1=7795419, Supplier 1=Digikey, Termination=SMD/SMT, Tolerance=5%, Voltage Rating (AC)=50V, Width=0.02inch
S1 S2: "Switch Tactile N.O. SPST Round Button Gull Wing 0.05A 12VDC 0.98N SMD T/R", Manufacturer="Alps Electric", Manufacturer Part Number=SKRKAHE020, Supplier Part Number 1=4809-SKRKAHE020CT-ND, Category="Tactile Switches", ComponentLink1Description=http://datasheet.octopart.com/SKRKAHE020-ALPS-datasheet-41327033.pdf?src-supplier=Farnell, ComponentLink1URL=http://datasheet.octopart.com/SKRKAHE020-ALPS-datasheet-41327033.pdf?src-supplier=Farnell, ComponentLink2Description=http://datasheet.octopart.com/SKRKAHE020-ALPS-datasheet-41327033.pdf?src-supplier=Avnet, ComponentLink2URL=http://datasheet.octopart.com/SKRKAHE020-ALPS-datasheet-41327033.pdf?src-supplier=Avnet, ComponentLink3Description=http://datasheet.octopart.com/SKRKAHE020-ALPS-datasheet-41327033.pdf?src-supplier=Onlinecomponents.com, ComponentLink3URL=http://datasheet.octopart.com/SKRKAHE020-ALPS-datasheet-41327033.pdf?src-supplier=Onlinecomponents.com, ComponentLink4Description=http://datasheet.octopart.com/SKRKAHE020-ALPS-datasheet-41327033.pdf?src-supplier=Verical, ComponentLink4URL=http://datasheet.octopart.com/SKRKAHE020-ALPS-datasheet-41327033.pdf?src-supplier=Verical, ComponentLink5Description=http://datasheet.octopart.com/SKRKAHE020-ALPS-datasheet-41327033.pdf?src-supplier=Future+Electronics, ComponentLink5URL=http://datasheet.octopart.com/SKRKAHE020-ALPS-datasheet-41327033.pdf?src-supplier=Future+Electronics, ComponentLink6Description=https://datasheet.octopart.com/SKRKAHE020-ALPS-datasheet-156009340.pdf?src-supplier=Electro+Sonic, ComponentLink6URL=https://datasheet.octopart.com/SKRKAHE020-ALPS-datasheet-156009340.pdf?src-supplier=Electro+Sonic, ComponentLink7Description=http://datasheet.octopart.com/SKRKAHE020-ALPS-datasheet-41327033.pdf?src-supplier=Quest, ComponentLink7URL=http://datasheet.octopart.com/SKRKAHE020-ALPS-datasheet-41327033.pdf?src-supplier=Quest, ComponentLink8Description=https://datasheet.octopart.com/SKRKAHE020-ALPS-datasheet-41327033.pdf?src-supplier=Master+Electronics, ComponentLink8URL=https://datasheet.octopart.com/SKRKAHE020-ALPS-datasheet-41327033.pdf?src-supplier=Master+Electronics, Pricing 1="1=0.41, 10=0.351, 25=0.3276, 100=0.2931, 250=0.27156, 500=0.2563, 1000=0.24208 (USD)", RoHS=Yes, RoHS Compliant=Yes, Stock 1=19659, Supplier 1=Digikey
U1: "Ultra-low-power with FPU ARM Cortex-M4 MCU 80 MHz with 128 Kbytes Flash, USB", Case/Package=UFQFPN, Manufacturer=STMicroelectronics, Max Operating Temperature=85°C, Min Operating Temperature=-40°C, Supplier Part Number 1=497-16577-ND, Category=Microcontrollers, ComponentLink1Description=http://www.farnell.com/datasheets/2283391.pdf?src-supplier=Farnell, ComponentLink1URL=http://www.farnell.com/datasheets/2283391.pdf?src-supplier=Farnell, ComponentLink2Description=http://www.st.com/content/ccc/resource/technical/document/datasheet/24/01/9f/59/f0/83/47/fc/DM00257205.pdf/files/DM00257205.pdf/jcr:content/translations/en.DM00257205.pdf?src-supplier=Digikey, ComponentLink2URL=http://www.st.com/content/ccc/resource/technical/document/datasheet/24/01/9f/59/f0/83/47/fc/DM00257205.pdf/files/DM00257205.pdf/jcr:content/translations/en.DM00257205.pdf?src-supplier=Digikey, ComponentLink3Description=http://www.farnell.com/datasheets/2283391.pdf?src-supplier=Newark, ComponentLink3URL=http://www.farnell.com/datasheets/2283391.pdf?src-supplier=Newark, ComponentLink4Description=https://datasheet.octopart.com/STM32L432KBU6-STMicroelectronics-datasheet-62336852.pdf?src-supplier=SHENGYU+ELECTRONICS, ComponentLink4URL=https://datasheet.octopart.com/STM32L432KBU6-STMicroelectronics-datasheet-62336852.pdf?src-supplier=SHENGYU+ELECTRONICS, ComponentLink5Description=https://datasheet.octopart.com/STM32L432KBU6-STMicroelectronics-datasheet-137130199.pdf?src-supplier=TME, ComponentLink5URL=https://datasheet.octopart.com/STM32L432KBU6-STMicroelectronics-datasheet-137130199.pdf?src-supplier=TME, Core Architecture=ARM, Interface=I2C,SPI,USB,IrDA,UART,USART, Manufacturer Part Number=STM32L432KBU6, Memory Size=128KB, Memory Type=FLASH, Number of I/Os=26, Oscillator Type=Internal, Packaging=Tray, Peripherals="Brown-out Detect/Reset,PWM,WDT,DMA", Pricing 1="1=4.33, 10=3.284, 25=3.0224, 100=2.7343, 250=2.59696, 500=2.51416, 1000=2.44602, 2940=2.3632 (USD)", RoHS=Yes, RoHS Compliant=Yes, Series=STM32L4, Stock 1=10176, Supplier 1=Digikey
U2: library part USBLC6-2SC6, "ESD Suppressor Diode Array Dual Uni-Dir 15kV Air Gap/15kV Contact Disc 6-Pin SOT-23 T/R", Breakdown Voltage=6V, Capacitance=3.5pF, Case/Package=SOT-23, Clamping Voltage=17V, LCSC=C5250994, Leakage Current=150nA, Manufacturer=STMicroelectronics, Max Operating Temperature=125°C, Max Repetitive Reverse Voltage (Vrrm)=5.25V, Min Operating Temperature=-40°C, Operating Supply Voltage=1.1V, Package Quantity=3000, Peak Pulse Current=5A, Power Line Protection=Yes, Supplier Part Number 1=497-5235-1-ND, Test Current=1mA, Working Voltage=5V, Category="TVS Diodes", Clamping Voltage-Max=17V, ComponentLink1Description=https://datasheet.ciiva.com/1268/1690354-1268384.pdf?src-supplier=Element14, ComponentLink1URL=https://datasheet.ciiva.com/1268/1690354-1268384.pdf?src-supplier=Element14, ComponentLink2Description=https://datasheet.ciiva.com/4508/cd00050750-113117-4508433.pdf?src-supplier=Mouser, ComponentLink2URL=https://datasheet.ciiva.com/4508/cd00050750-113117-4508433.pdf?src-supplier=Mouser, ComponentLink3Description=https://datasheet.ciiva.com/41444/001184109-da-01-en-ic-esd-protecti-usblc6-2sc6-sot-23-6-stm-41444156.pdf?src-supplier=Conrad, ComponentLink3URL=https://datasheet.ciiva.com/41444/001184109-da-01-en-ic-esd-protecti-usblc6-2sc6-sot-23-6-stm-41444156.pdf?src-supplier=Conrad, Data Rate=480Mbps, Depth=1.75mm, Direction=Unidirectional,Bidirectional, ESD Protection=Yes, Height=1.3mm, Lead Free="Lead Free", Length=3.05mm, Manufacturer Part Number=USBLC6-2SC6, Max Breakdown Voltage=6V, Max Reverse Leakage Current=150nA, Min Breakdown Voltage=6V, Mount="Surface Mount", Number of Bidirectional Channels=2, Number of Channels=2, Number of Elements=1, Number of Pins=6, Packaging="Tape and Reel", Polarity=Unidirectional,Bidirectional, Pricing 1="1=0.36, 10=0.243, 100=0.163, 500=0.127, 1000=0.114, 3000=0.09, 6000=0.084, 9000=0.078, 15000=0.077, 21000=0.0755, 30000=0.075 (USD)", Radiation Hardening=No, Reach SVHC Compliant=No, Reverse Breakdown Voltage=6V, Reverse Standoff Voltage=5.25V, RoHS=Yes, RoHS Compliant=Yes, Series=USB, Stock 1=85420, Supplier 1=Digikey, Termination=SMD/SMT, Width=1.75mm
U3: "Reflective Optical Sensor 0.02 (0.5mm) 4-SMD Module", Package="SMD-4 Vishay", Check_prices=https://www.snapeda.com/parts/VCNT2020/Vishay+Semiconductor+Opto+Division/view-part/?ref=eda, MF=Vishay, MP=VCNT2020, SnapEDA_Link=https://www.snapeda.com/parts/VCNT2020/Vishay+Semiconductor+Opto+Division/view-part/?ref=snap
U4: "Linear Voltage Regulator IC Positive Fixed 1 Output 600mA SOT-25", Package="SOT-753 Diodes Inc.", Availability="In Stock", Check_prices=https://www.snapeda.com/parts/AP2112K-3.3TRG1/Diodes+Inc./view-part/?ref=eda, MF="Diodes Inc.", MP=AP2112K-3.3TRG1, Price=None, Purchase-URL=https://pricing.snapeda.com/search/part/AP2112K-3.3TRG1/?ref=eda, SnapEDA_Link=https://www.snapeda.com/parts/AP2112K-3.3TRG1/Diodes+Inc./view-part/?ref=snap
U5: "6.5V /Polymer 1 500mA SOT-23-6 Battery Management ICs ROHS", Manufacturer="UMW(Youtai Semiconductor)", Supplier Part Number 1=4518-TP4057CT-ND, Category="Battery Management", Manufacturer Part Number=TP4057, Pricing 1="1=0.24, 10=0.162, 25=0.1436, 100=0.1227, 250=0.1128, 500=0.10682, 1000=0.10191 (USD)", RoHS=No, Stock 1=6000, Supplier 1=Digikey
U6: "Trans Mosfet P-ch 20V 0.66A 6-PIN SOT-363 T/r", Case/Package=SOT-363, Continuous Drain Current (ID)=660mA, Drain to Source Voltage (Vdss)=20V, Input Capacitance=170pF, Manufacturer=Comchip, Max Operating Temperature=150°C, Max Power Dissipation=150mW, Min Operating Temperature=-40°C, Supplier Part Number 1=641-1793-1-ND, ComponentLink1Description="http://www.comchiptech.com/admin/files/product/CJ3139KDW-G RevA829375.pdf?src-supplier=Digikey", ComponentLink1URL="http://www.comchiptech.com/admin/files/product/CJ3139KDW-G RevA829375.pdf?src-supplier=Digikey", Manufacturer Part Number=CJ3139KDW-G, Mount="Surface Mount", Packaging="Cut Tape", Pricing 1="1=0.54, 10=0.412, 100=0.2644, 500=0.2005, 1000=0.17988 (USD)", Rds On Max=520mR, RoHS=Yes, RoHS Compliant=Yes, Series=-, Stock 1=972, Supplier 1=Digikey
Y1: library part Crystal_8MHz_SMD, "Crystal 8MHz ±20ppm (Tol) ±30ppm (Stability) 12pF FUND 400Ohm 4-Pin Mini-CSMD T/R", Manufacturer="ECS International", Supplier Part Number 1=50-ECS-80-12-33-JGN-CT-ND, Category=Crystals, ComponentLink1Description=https://datasheet.octopart.com/ECS-80-12-33-JGN-TR-ECS-International-datasheet-140089731.pdf?src-supplier=Future+Electronics, ComponentLink1URL=https://datasheet.octopart.com/ECS-80-12-33-JGN-TR-ECS-International-datasheet-140089731.pdf?src-supplier=Future+Electronics, ComponentLink2Description=https://datasheet.octopart.com/ECS-80-12-33-JGN-TR-ECS-International-datasheet-17018741.pdf?src-supplier=Master+Electronics, ComponentLink2URL=https://datasheet.octopart.com/ECS-80-12-33-JGN-TR-ECS-International-datasheet-17018741.pdf?src-supplier=Master+Electronics, Manufacturer Part Number=ECS-80-12-33-JGN-TR, Pricing 1="1=0.56, 10=0.486, 50=0.4402, 100=0.422, 500=0.38258 (USD)", RoHS=No, RoHS Compliant=Yes, Stock 1=25392, Supplier 1=Digikey

## Via types
v1: diameter 0.35, hole 0.15, Top Layer to Bottom Layer, 62 vias
v2: diameter 0.65, hole 0.25, Top Layer to Bottom Layer, 2 vias
v3: diameter 0.635, hole 0.305, Top Layer to Bottom Layer, 2 vias

## Nets (pads, with @x,y where several pads share a name; then routed paths per layer and width w, separated by ;. In a path a pad name is that pad's centre, name@x,y a point inside that pad or via, vN(x,y) a via of type N, cw(c..) or ccw(c..) an arc to the next point about the centre after c; other vN are vias at no path point)
3V3: C4.1 C8.1 C9.1 C10.1 C11.2 J5.5 R13.2 R14.2 R17.1 S2.2 U1.1 U1.5 U1.17 U4.5 | length 91.3
  Top Layer w0.125: v1(8.509,14.605) 9.132,14.605 9.307,14.431 9.621,14.431 C11.2 9.853,14.273 10.189,14.609 U1.5
  Top Layer w0.254: J5.5 2.985,21.59 5.461,21.59 ; S2.2 3.429,7.112 v1(8.128,11.811) 8.128,14.224 v1(8.509,14.605) ; R13.2 4.953,25.019 5.588,24.384 5.588,21.717 5.461,21.59 ; U1.1 10.835,16.609 10.619,16.825 C9.1 10.059,19.05 9.932,18.923 v1(9.906,18.923) 7.239,21.59 5.461,21.59 ; v1(14.224,9.525) 14.732,9.017 15.24,9.017 ; 15.66,6.516 15.24,6.936 15.24,9.017 ; U1.17 15.835,13.109 16.383,12.561 16.383,11 C10.1 ; v1(20.32,12.954) 18.923,12.954 16.891,10.922 C10.1 ; v1(20.32,17.78) 20.32,18.415 21.082,19.177 24.003,19.177 24.511,19.685 24.511,21.463 24.081,21.893 R14.2 v1(23.495,23.114) ; R17.1 v1(21.717,23.622) ; 15.24,9.017 15.748,9.017 16.305,9.574 C10.1
  Top Layer w0.508: C4.1 15.953,6.809 15.66,6.516 15.367,6.223 15.367,3.473 15.68,3.16 16.93,3.16 U4.5 17.018,3.072 17.018,1.143 17.653,0.508 21.463,0.508 22.098,1.143 C8.1
  Bottom Layer w0.254: v1(8.128,11.811) 10.414,9.525 v1(14.224,9.525) ; v1(8.509,14.605) 8.509,17.526 v1(9.906,18.923) ; v1(20.32,12.954) v1(20.32,17.78) ; v1(21.717,23.622) 22.987,23.622 v1(23.495,23.114)
BOOT: R15.2 R16.2 U1.31 | length 24
  Top Layer w0.125: R15.2 4.572,5.969 4.572,7.239 9.017,11.684 v1(9.017,14.097) ; U1.31 12.085,18.308 12.192,18.415 v1(12.192,20.066)
  Top Layer w0.203: R15.2 R16.2
  Bottom Layer w0.125: v1(9.017,14.097) 10.541,14.097 11.43,14.986 11.43,19.304 v1(12.192,20.066)
D+: U1.22 U2.6 | length 6.1
  Top Layer w0.125: U1.22 15.697,15.621 16.51,15.621 16.764,15.367 v1(18.542,15.367) ; v1(19.558,14.478) 20.04,13.996 U2.6
  Bottom Layer w0.125: v1(18.542,15.367) 18.581,15.367 18.818,15.13 18.906,15.13 v1(19.558,14.478)
D-: U1.21 U2.4 | length 6
  Top Layer w0.125: U1.21 17.657,15.109 18.011,14.755 18.946,14.755 v1(19.558,15.367) 20.087,15.896 U2.4
GND: C1.2 C2.2 C3.2 C4.2 C5.2 C6.1 C7.2 C8.2 C9.2 C10.2 C11.1 D3.C J1.A1/B12 J1.B1/A12 J1.S1 J1.S2 J1.S3 J1.S4 J2.4 J3.4 J5.4 J6.2 Q1.2 R1.2 R2.1 R11.2 R12.2 R16.1 S1.1 U1.16 U1.32 U1.33 U2.2 U3.1 U4.2 U5.2 Y1.2 Y1.4 | length 99.5
  Top Layer w0.125: Y1.2 5.323,14.632 5.666,14.289 C2.2 ; C1.2 6.653,20.544 7.239,19.958 7.239,18.471 Y1.4 ; v1(9.779,11.811) C11.1
  Top Layer w0.254: C7.2 v1(4.191,23.622) ; v1(3.683,16.129) 3.757,16.055 Y1.2 ; R16.1 12.397,3.507 12.7,3.81 12.7,5.044 J3.4 12.803,5.591 13.843,6.631 v1(13.843,7.493) ; S1.1 v1(8.636,27.432) ; Y1.4 8.195,18.355 v1(8.382,18.542) ; v1(10.922,20.066) 11.43,20.066 ; U1.32 11.562,17.232 11.562,18.967 C9.2 11.43,19.099 11.43,20.066 ; J2.4 12.408,23.746 11.43,22.768 11.43,20.066 ; U1.16 15.085,11.321 15.445,10.961 C10.2 15.445,9.984 15.367,9.906 v1(15.367,9.779) ; v1(16.256,7.747) 17.067,7.747 C4.2 ; v1(18.288,6.096) 18.379,6.187 18.379,6.667 18.521,6.809 C3.2 ; U4.2 21.183,4.064 21.437,3.81 v1(21.463,3.81) ; U3.1 20.574,21.582 20.574,22.479 20.828,22.733 21.971,22.733 23.114,23.876 26.035,23.876 26.416,23.495 26.416,20.104 J1.S2 ; v1(22.176,11.176) R1.2 22.192,12.208 22.192,12.794 22.86,13.462 22.86,14.946 ; U2.2 22.86,14.946 ; C6.1 25.781,3.175 26.416,3.81 26.797,3.81 ; Q1.2 25.292,27.813 v1(27.559,27.813) ; J1.A1/B12 25.849,10.451 26.267,10.033 J1.S1 ; U5.2 26.797,3.81 ; J1.S4 J1.S2 ; v1(30.861,2.655) 30.873,2.655 31.115,2.413 R12.2 R11.2 27.051,1.778 26.797,2.032 26.797,3.81 ; 31.129,5.957 D3.C ; 22.86,14.946 22.86,16.256 22.176,16.94 R2.1 22.225,17.829 22.225,18.415 22.479,18.669 24.638,18.669 24.948,18.359 25.676,18.359 J1.B1/A12 25.849,19.521 J1.S2
  Top Layer w0.508: C5.2 J1.S1@26.267,10.033 ; C8.2 24.941,1.173 25.018,1.25 C6.1 ; J1.S1 J1.S3 v2(30.353,7.62) v2(30.353,7.62) ; v2(30.353,22.987) v2(30.353,22.987) J1.S4
  Bottom Layer w0.254: v1(30.861,2.655) 30.861,5.715 v1(30.988,5.842)
  other v1: 11.938,13.462 14.732,13.462 13.335,14.859 11.938,16.256 14.732,16.256 8.382,21.844
LED_1: R9.1 U1.10 | length 5.5
  Top Layer w0.125: R9.1 9.779,9.017 12.085,11.323 U1.10
LED_2: R5.1 U1.11 | length 5.2
  Top Layer w0.125: R5.1 11.176,9.144 12.585,10.553 U1.11
LED_3: R19.1 U1.12 | length 4.8
  Top Layer w0.125: R19.1 12.573,9.017 13.085,9.529 U1.12
LED_4: R4.1 U1.26 | length 4.6
  Top Layer w0.125: U1.26 14.585,17.887 15.621,18.923 15.621,21.16 R4.1
LED_5: R3.1 U1.27 | length 4.4
  Top Layer w0.125: U1.27 14.085,18.657 14.605,19.177 14.605,20.098 14.351,20.352 R3.1
LED_6: R18.1 U1.28 | length 4.3
  Top Layer w0.125: R18.1 12.954,19.431 13.585,18.8 U1.28
NetC3_1: C3.1 D4.1 R6.2 U4.1 U6.1 | length 17.5